# Altium PCB Window_shad_IIs.PcbDoc
Units mil, origin at the board's own origin, x right, y up, seen from the top; angles counter-clockwise.
Board outline 3937.01 x 1968.5 mil, 2 copper layers (Top Layer, Bottom Layer); 29 components, 40 nets, 153 pads, 16 vias.
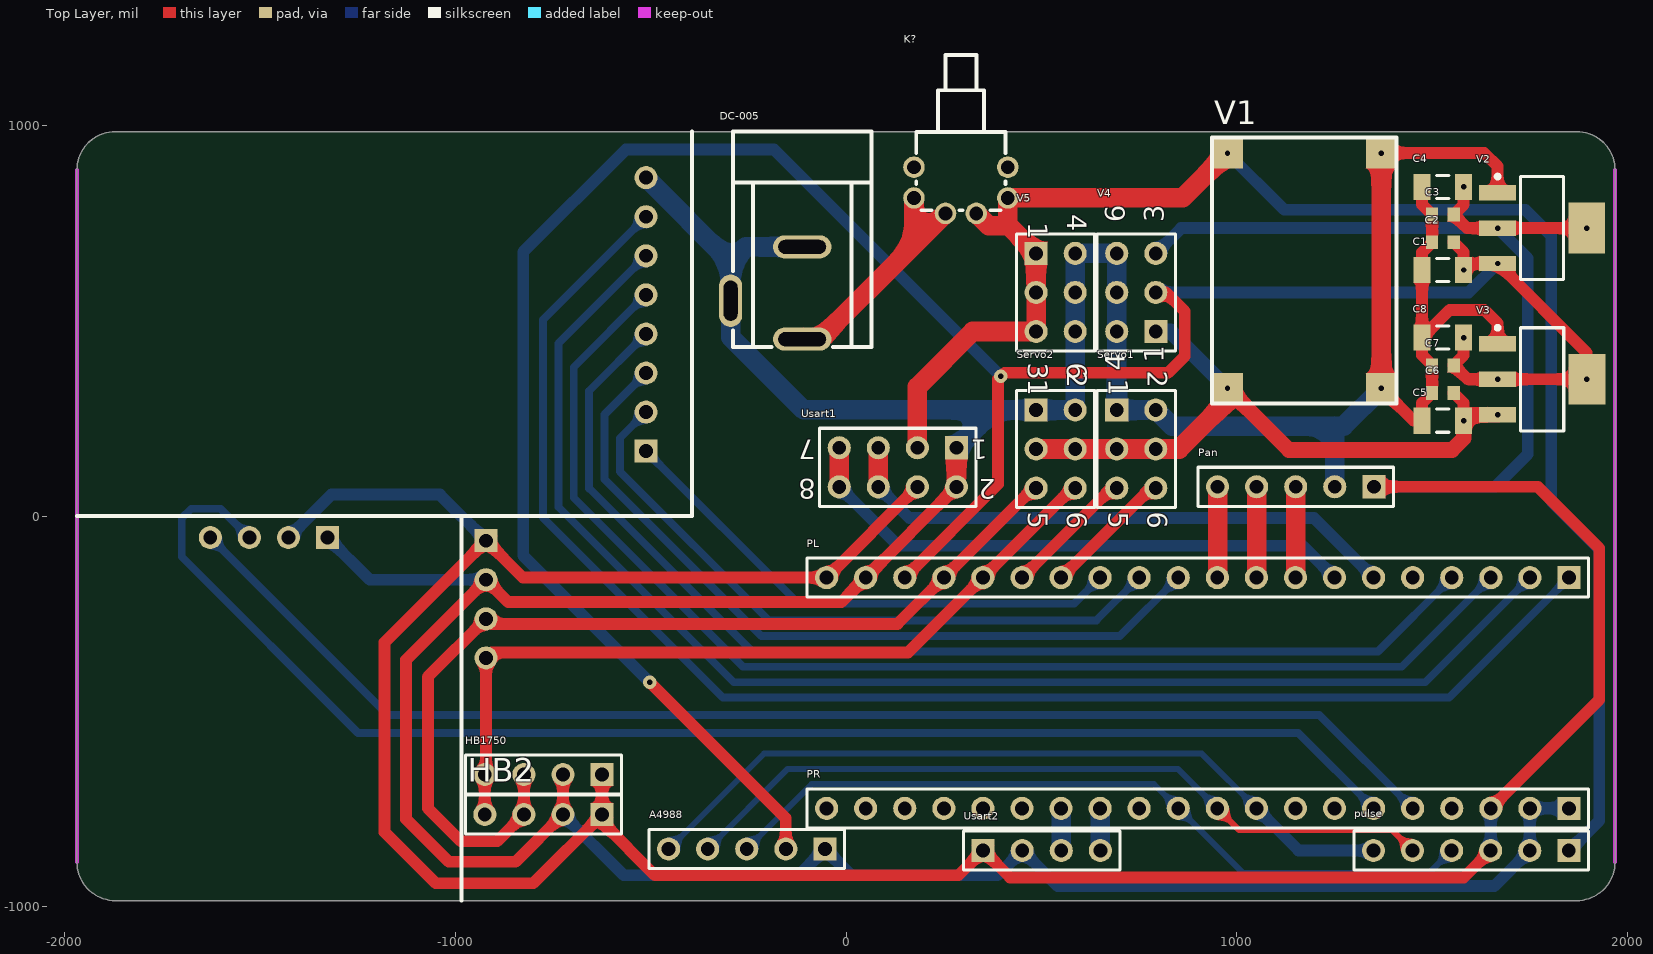
[diagram p0: Top Layer view]
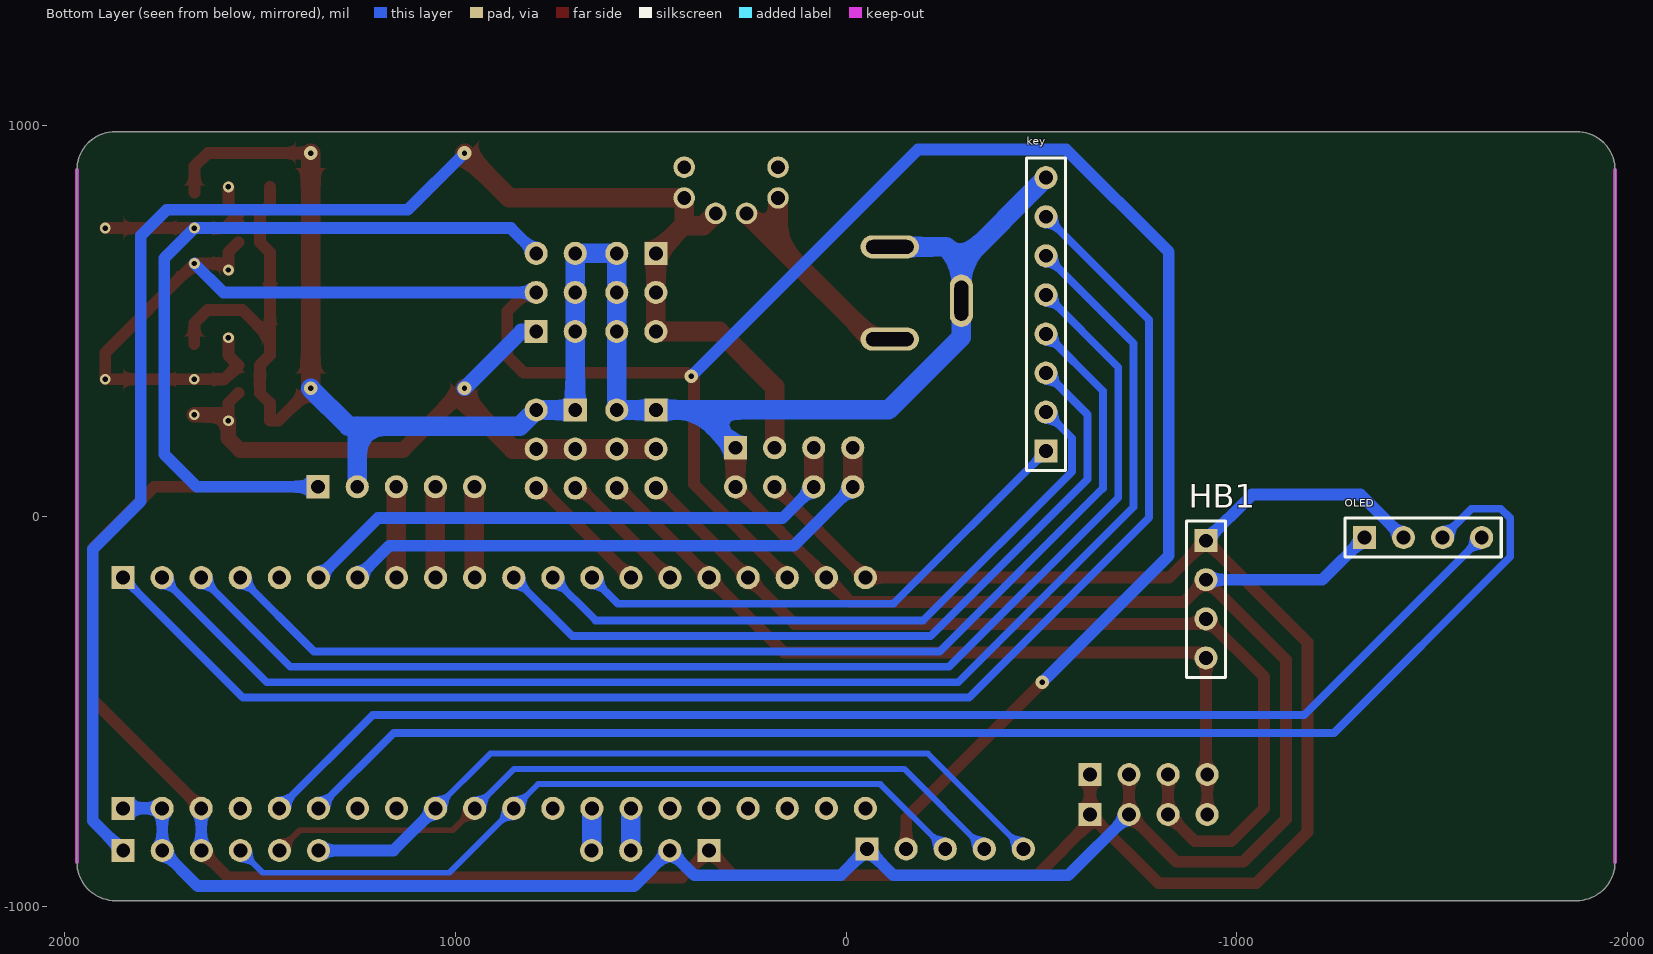
[diagram p1: Bottom Layer view, seen from below]

## Layer stack, top to bottom
Top Solder: solder mask 0.4, Solder Resist, Dk 3.5
Top Layer: signal copper 1.4
Dielectric 1: dielectric 12.6, FR-4, Dk 4.8
Bottom Layer: signal copper 1.4
Bottom Solder: solder mask 0.4, Solder Resist, Dk 3.5

## Board outline
-1870.08,-984.25 cw(c-1870.08,-885.83) -1968.5,-885.83 -1968.5,885.83 cw(c-1870.08,885.83) -1870.08,984.25 1870.08,984.25 cw(c1870.08,885.83) 1968.5,885.83 1968.5,-885.83 cw(c1870.08,-885.83) 1870.08,-984.25

## Design rules (kind name [scope] priority, off if disabled: settings)
Clearance [All] p1: gap=10 ignorepadtopadclearanceinfootprint=TRUE except(0: Arc-Hole Track-Hole SMDPad-Hole THPad-Hole Via-Hole Fill-Hole Poly-Hole Region-Hole Text-Hole)
ComponentClearance [All] p1: gap=0 collisioncheckmode=3 verticalgap=0 showdistances=FALSE
HoleToHoleClearance [All] p1: gap=0 allowstackedmicrovias=TRUE
MinimumSolderMaskSliver [All] p1: minsoldermaskwidth=0
PolygonConnect [All] p1: connectstyle=Direct reliefconductorwidth=10 reliefentries=4 polygonreliefangle="90 Angle" airgapwidth=10
RoutingVias [All] p1: holewidth=28 width=50 viastyle="Through Hole" minholewidth=10 minwidth=20 maxholewidth=58 maxwidth=100
SilkToSilkClearance [All] p1: silktosilkclearance=0
SilkToSolderMaskClearance [IsPad] p1: minsilkscreentomaskgap=0 clearancetoexposedcopper=TRUE
SolderMaskExpansion [All] p1: expansion=4
Width [All] p1: maxlimit=300 minlimit=10 preferedwidth=15
25 further rules are at their usual default settings.

## Components (designator, comment, footprint, x,y, rotation, side; value= is the part's Value field where it differs from the comment)
A4988 "Header 5" HDR1X5 -54,-852 r180 top
C1 "Cap Pol3" C1206 1527.56,629.92 r180 top value=10uf
C2 "Cap Semi" 1608[0603] 1527.56,700.79 r0 top value=104
C3 "Cap Semi" 1608[0603] 1527.56,771.65 r0 top value=104
C4 "Cap Pol3" C1206 1527.56,842.52 r180 top value=10uf
C5 "Cap Pol3" C1206 1527.56,244.09 r180 top value=10uf
C6 "Cap Semi" 1608[0603] 1527.56,314.96 r0 top value=104
C7 "Cap Semi" 1608[0603] 1527.56,385.83 r0 top value=104
C8 "Cap Pol3" C1206 1527.56,456.69 r180 top value=10uf
DC-005 "DC-005" DC12V -295.28,551.18 r270 top
HB1 "Header 4" HDR1X4 -921.26,-62.99 r270 bottom
HB2 "Header 4" HDR1X4 -624.41,-763.78 r180 top
HB1750 "Header 4" HDR1X4 -624.41,-661.42 r180 top
K? "BUTTON" Latching_switch 333.5,774.8 r180 top
key "Header 8" HDR1X8 -511.81,166.14 r90 bottom
OLED "Header 4" HDR1X4 -1327,-55 r180 bottom
Pan "Header 5" HDR1X5 1351,75 r180 top
PL "Header 20" HDR1X20 1850.39,-157.48 r180 top
PR "Header 20" HDR1X20 1850.39,-748.03 r180 top
pulse "Header 6" HDR1X6 1850,-856 r180 top
Servo1 "Header 3X2" HDR2X3 692.91,271.65 r270 top
Servo2 "Header 3X2" HDR2X3 486.61,271.65 r270 top
Usart1 "Header 4X2" HDR2X4 282.68,174.8 r180 top
Usart2 "Header 4" HDR1X4 351,-856 r0 top
V1 "LM2596S" MP1584EN 937.01,968.5 r270 top
V2 "AMS1117-3.3" SOT-223(AMS1117-3.3) 1781.81,737.07 r270 top
V3 "AMS1117-5" SOT-223(AMS1117-3.3) 1782,350.06 r270 top
V4 "Header 3X2A" HDR2X3_CEN 792.91,472.44 r90 top
V5 "Header 3X2A" HDR2X3_CEN 486.61,672.44 r270 top

## Footprints (in the part's own frame and the unit in brackets; to place one, negate y for a bottom-side part, rotate by r counter-clockwise, add the part's x,y. Pads: shape width x height; smd on the part's side, far side on the other; paste and mask are expansions set on the pad)
1608[0603] [mm] "Chip Capacitor, Body 1.6x0.8mm, IPC High Density"
  rect 0.8x0.9 smd: 1(-0.7,0) 2(0.7,0)
  body extent -0.87,-0.48 0.87,0.48, height 1.3
C1206 [mm] "Chip Capacitor, Body 3.2x1.6mm, IPC High Density"
  rect 1.1x1.7 smd: 1(-1.35,0) 2(1.35,0)
  silkscreen extent -0.4,-0.75 0.4,0.75, body extent -1.7,-0.9 1.7,0.9, height 1.3
DC12V [mil]
  oval 59.1x149.6 hole 35.4 slot 122.1 at 90 deg mask+2: 1(98.4,183.1) 2(-137.8,183.1)
  oval 133.9x59.1 hole 35.4 slot 102.4 at 0 deg mask+2: 3(0,0)
  silkscreen extent -433,6 118,360
HDR1X4 [mm] "Connector; Header; 4 Position"
  rect 1.5x1.5 hole 0.9: 1(0,0)
  round 1.5 hole 0.9: 2(2.54,0) 3(5.08,0) 4(7.62,0)
  silkscreen extent -1.27,-1.27 8.89,1.27
HDR1X5 [mm] "Connector; Header; 5 Position"
  rect 1.5x1.5 hole 0.9: 1(0,0)
  round 1.5 hole 0.9: 2(2.54,0) 3(5.08,0) 4(7.62,0) 5(10.16,0)
  silkscreen extent -1.27,-1.27 11.43,1.27
HDR1X6 [mm] "Connector; Header; 6 Position"
  rect 1.5x1.5 hole 0.9: 1(0,0)
  round 1.5 hole 0.9: 2(2.54,0) 3(5.08,0) 4(7.62,0) 5(10.16,0) 6(12.7,0)
  silkscreen extent -1.27,-1.27 13.97,1.27
HDR1X8 [mm] "Connector; Header; 8 Position"
  rect 1.5x1.5 hole 0.9: 1(0,0)
  round 1.5 hole 0.9: 2(2.54,0) 3(5.08,0) 4(7.62,0) 5(10.16,0) 6(12.7,0) 7(15.24,0) 8(17.78,0)
  silkscreen extent -1.27,-1.27 19.05,1.27
HDR1X20 [mm] "Connector; Header; 20 Position"
  rect 1.5x1.5 hole 0.9: 1(0,0)
  round 1.5 hole 0.9: 2(2.54,0) 3(5.08,0) 4(7.62,0) 5(10.16,0) 6(12.7,0) 7(15.24,0) 8(17.78,0) 9(20.32,0) 10(22.86,0) 11(25.4,0) 12(27.94,0) 13(30.48,0) 14(33.02,0) 15(35.56,0) 16(38.1,0) 17(40.64,0) 18(43.18,0) 19(45.72,0) 20(48.26,0)
  silkscreen extent -1.27,-1.27 49.53,1.27
HDR2X3 [mm] "Connector; Header; 3x2 Position"
  rect 1.5x1.5 hole 0.9: 1(0,0)
  round 1.5 hole 0.9: 2(0,2.54) 3(2.54,0) 4(2.54,2.54) 5(5.08,0) 6(5.08,2.54)
  silkscreen extent -1.27,-1.27 6.35,3.81
HDR2X3_CEN [mm] "Connector; Header; 3x2 Position"
  rect 1.5x1.5 hole 0.9: 1(0,0)
  round 1.5 hole 0.9: 2(2.54,0) 3(5.08,0) 4(0,2.54) 5(2.54,2.54) 6(5.08,2.54)
  silkscreen extent -1.27,-1.27 6.35,3.81
HDR2X4 [mm] "Connector; Header; 4x2 Position"
  rect 1.5x1.5 hole 0.9: 1(0,0)
  round 1.5 hole 0.9: 2(0,2.54) 3(2.54,0) 4(2.54,2.54) 5(5.08,0) 6(5.08,2.54) 7(7.62,0) 8(7.62,2.54)
  silkscreen extent -1.27,-1.27 8.89,3.81
Latching_switch [mil]
  round 55.1 hole 35.4 mask+2: 1(159.5,-118.2) 2(159.5,-39.4) 3(-80.7,-118.2) 4(-80.7,-39.4) 5(78.8,0) 6(0,0)
  silkscreen extent -75,-406 154,-8, body extent -89,-407 167,4, height 228
MP1584EN [mm]
  rect 2x2 smd: 1(1,11) 2(1,1) 3(16.3,11) 4(16.3,1)
  silkscreen extent 0,0 17.27,12
SOT-223(AMS1117-3.3) [mm]
  rect 1x2.4 smd: 1(-2.3,-2.9) 2(0,-2.9) 3(2.3,-2.9)
  rect 3.3x2.4 smd: 4(0,2.9)
  silkscreen extent -3.47,-3.02 3.35,1.4, body extent -3.25,-3.48 3.25,3.48, height 1.7

## Part data
A4988 Pan: "Header, 5-Pin", LatestRevisionDate=17-Jul-2002, LatestRevisionNote="Re-released for DXP Platform.", Publisher="Altium Limited"
C1 C4 C5 C8: "Polarized Capacitor (Surface Mount)", LatestRevisionDate=29-May-2009, LatestRevisionNote="IPC-7351 Footprint Added.", PackageDescription="Chip Capacitor", PackageReference=C0805, Published=8-Jun-2000, Publisher="Altium Limited"
C2 C3 C6 C7: "Capacitor (Semiconductor SIM Model)", LatestRevisionDate=29-May-2009, LatestRevisionNote="IPC-7351 Footprint Added.", PackageDescription="Chip Capacitor", PackageReference=C1206, Published=8-Jun-2000, Publisher="Altium Limited"
DC-005: library part "Header 3", "Header, 3-Pin", LatestRevisionDate=17-Jul-2002, LatestRevisionNote="Re-released for DXP Platform.", Publisher="Altium Limited"
HB1 HB2 HB1750 OLED Usart2: "Header, 4-Pin", LatestRevisionDate=17-Jul-2002, LatestRevisionNote="Re-released for DXP Platform.", Publisher="Altium Limited"
K?: library part KEY-6
key: "Header, 8-Pin", LatestRevisionDate=17-Jul-2002, LatestRevisionNote="Re-released for DXP Platform.", Publisher="Altium Limited"
PL PR: "Header, 20-Pin", LatestRevisionDate=17-Jul-2002, LatestRevisionNote="Re-released for DXP Platform.", Publisher="Altium Limited"
pulse: "Header, 6-Pin", LatestRevisionDate=17-Jul-2002, LatestRevisionNote="Re-released for DXP Platform.", Publisher="Altium Limited"
Servo1 Servo2 V4 V5: "Header, 3-Pin, Dual row", LatestRevisionDate=17-Jul-2002, LatestRevisionNote="Re-released for DXP Platform.", Publisher="Altium Limited"
Usart1: "Header, 4-Pin, Dual row", LatestRevisionDate=17-Jul-2002, LatestRevisionNote="Re-released for DXP Platform.", Publisher="Altium Limited"
V3: library part AMS1117-3.3

## Via types
v1: diameter 27.56, hole 13.78, Top Layer to Bottom Layer, tented both sides, 10 vias
v2: diameter 35, hole 13.78, Top Layer to Bottom Layer, tented both sides, 6 vias

## Nets (pads, with @x,y where several pads share a name; then routed paths per layer and width w, separated by ;. In a path a pad name is that pad's centre, name@x,y a point inside that pad or via, vN(x,y) a via of type N, cw(c..) or ccw(c..) an arc to the next point about the centre after c; other vN are vias at no path point)
GND: A4988.1 C1.2 C2.1 C3.1 C4.2 C5.2 C6.1 C7.1 C8.2 DC-005.2 DC-005.3 HB1.2 HB2.2 HB1750.2 key.8 OLED.1 Pan.2 PL.19 PR.1 PR.2 pulse.2 Servo1.1 Servo1.2 Servo2.1 Servo2.2 Usart1.1 Usart1.2 Usart2.2 V1.1 V1.3 V2.1 V3.1 V4.4 V4.5 V4.6 V5.4 V5.5 V5.6 | length 11742.5
  Top Layer w30: HB1750.2 HB2.2 -845.63,-885 -1017,-885 -1126,-776 -1126,-367.73 HB1.2 -864.25,-220 -12.13,-220 PL.19 Usart1.2 ; v2(1370.08,326.77) 1452.76,244.09 C5.2 1474.41,289.37 C6.1 C7.1 1474.41,411.42 C8.2 ; v2(1370.08,929.13) 1633.86,929.13 1667.64,895.36 V2.1 ; C4.2 1474.41,797.24 C3.1 C2.1 1474.41,675.2 C1.2 C8.2 ; V3.1 1667.83,493.59 1633.86,527.56 1545.28,527.56 C8.2
  Top Layer w50: Usart1.2 Usart1.1 ; v2(1370.08,326.77) v2(1370.08,929.13)
  Bottom Layer w30: OLED.1 -1219.01,-162.99 HB1.2 ; HB2.2 -569.19,-919 -121,-919 A4988.1 13,-919 388,-919 Usart2.2 542,-947 1659,-947 pulse.2 1750,-748.43 PR.2 PR.1
  Bottom Layer w50: key.8 -295.28,649.61 ; DC-005.2 -255.9,688.98 -295.28,649.61 ; Usart1.1 379.53,271.65 ; Pan.2 1251,230 ; v2(1370.08,326.77) 1273.31,230 1251,230 ; -295.28,649.61 DC-005.3 -295.28,458.28 -108.65,271.65 379.53,271.65 ; 379.53,271.65 Servo2.1 Servo2.2 V5.6 V5.5 V5.4 V4.6 V4.5 V4.4 Servo1.1 Servo1.2 834.57,230 1251,230
PA0: PR.16
PA1: PR.15
PA2: PR.14 Usart2.3 | length 108.2
  Bottom Layer w15: PR.14 PR.14@551,-748.64
  Bottom Layer w50: Usart2.3 PR.14@551,-748.64
PA3: PR.13 Usart2.4 | length 108.2
  Bottom Layer w15: PR.13 PR.13@651,-748.64
  Bottom Layer w50: Usart2.4 PR.13@651,-748.64
PA4: PR.12
PA5: A4988.3 PR.11 pulse.4 | length 1990.4
  Bottom Layer w15: A4988.3 -88,-686 788.36,-686 PR.11 1015.36,-913 1493,-913 pulse.4
PA6: A4988.4 PR.10 pulse.5 | length 1975.5
  Top Layer w15: PR.10 1006.36,-804 1398,-804 pulse.5
  Bottom Layer w15: A4988.4 -149,-647 849.36,-647 PR.10
PA7: A4988.5 PR.9 pulse.6 | length 2007.8
  Bottom Layer w15: A4988.5 -210,-608 910.36,-608 PR.9
  Bottom Layer w30: PR.9 1158.36,-856 pulse.6
PA8: PL.5
PA9: PL.6 Usart1.5 Usart1.6 | length 1463.9
  Top Layer w50: Usart1.6 Usart1.5
  Bottom Layer w30: Usart1.6 162.48,-5 1197.91,-5 PL.6
PA10: PL.7 Usart1.7 Usart1.8 | length 1463.9
  Top Layer w50: Usart1.8 Usart1.7
  Bottom Layer w30: Usart1.8 133.48,-76 1168.91,-76 PL.7
PA11: Pan.3 PL.8 | length 232.7
  Top Layer w50: PL.8 1151,-156.87 Pan.3
PA12: Pan.4 PL.9 | length 232.7
  Top Layer w50: PL.9 1051,-156.87 Pan.4
PA15: Pan.5 PL.10 | length 232.7
  Top Layer w50: PL.10 951,-156.87 Pan.5
PB0: PR.8
PB1: PR.7
PB3: key.3 PL.11 | length 2012.5
  Bottom Layer w20: key.3 -618.11,259.84 -618.11,94.49 -216.54,-307.09 700.79,-307.09 PL.11
PB4: key.2 PL.12 | length 1712.1
  Bottom Layer w20: key.2 -578.74,199.21 -578.74,114.17 -197.57,-267 640.87,-267 PL.12
PB5: key.1 PL.13 | length 1351.7
  Bottom Layer w20: key.1 -121.26,-224.41 583.46,-224.41 PL.13
PB6: PL.14 Servo1.6 | length 337.4
  Top Layer w30: PL.14 779.53,71.65 Servo1.6
PB7: PL.15 Servo1.5 | length 337.4
  Top Layer w30: PL.15 679.53,71.65 Servo1.5
PB8: HB1.4 HB2.4 HB1750.4 PL.16 Servo2.6 | length 2090
  Top Layer w30: HB2.4 HB1750.4 -921.26,-658.27 HB1.4 -907.27,-349 158.87,-349 PL.16 579.53,71.65 Servo2.6
PB9: HB1.3 HB2.3 HB1750.3 PL.17 Servo2.5 | length 2514.9
  Top Layer w30: HB1750.3 HB2.3 -892.63,-832 -986,-832 -1070,-748 -1070,-411.73 HB1.3 -908.25,-276 131.87,-276 PL.17 479.53,71.65 Servo2.5
PB10: OLED.3 PR.6 | length 3629.8
  Bottom Layer w20: OLED.3 -1601,19 -1676,19 -1700,-5 -1700,-104 -1249,-555 1157.36,-555 PR.6
PB11: OLED.4 PR.5 | length 3364.5
  Bottom Layer w20: OLED.4 -1173,-509 1211.36,-509 PR.5
PB12: key.7 PL.1 | length 3823.3
  Bottom Layer w20: key.7 -775.59,502.36 -775.59,-3.94 -314.96,-464.57 1543.31,-464.57 PL.1
PB13: key.6 PL.2 | length 3518.9
  Bottom Layer w20: key.6 -736.22,441.73 -736.22,23.62 -287.4,-425.2 1482.68,-425.2 PL.2
PB14: key.5 PL.3 | length 3216.8
  Bottom Layer w20: key.5 -696.85,381.1 -696.85,47.24 -263.78,-385.83 1422.05,-385.83 PL.3
PB15: key.4 PL.4 | length 2914.6
  Bottom Layer w20: key.4 -657.48,320.47 -657.48,70.87 -240.16,-346.46 1361.42,-346.46 PL.4
PC13: PR.19
PC14: PR.18
PC15: PR.17
RST: PR.4
VBT: PR.20
VCC_3.3V: C3.2 C4.1 HB1.1 HB2.1 HB1750.1 OLED.2 Pan.1 PL.20 PR.3 pulse.3 Usart1.4 Usart2.1 V2.2 V2.4 V4.3 | length 9821.4
  Top Layer w30: HB1750.1 HB2.1 ; Usart1.4 PL.20 -826.77,-157.48 HB1.1 -1181,-322.73 -1181,-809 -1050,-940 -800.63,-940 HB2.1 ; Pan.1 1771,75 1928,-82 1928,-470.43 PR.3 ; v1(1580.71,842.52) 1580.71,797.24 C3.2 1589.7,737.07 v1(1667.64,737.07) v1(1895.99,737.07) ; pulse.3 1581,-925 420,-925 Usart2.1 288,-919 -489,-919 -624.41,-783.59 HB2.1
  Bottom Layer w30: OLED.2 -1317,55 -1039.25,55 HB1.1 ; V4.3 857.54,737.07 v1(1667.64,737.07) 1745,659.71 1745,158.39 1661.61,75 Pan.1 ; pulse.3 1650,-748.43 PR.3
VCC_5V: A4988.2 C1.1 C2.2 C7.2 C8.1 PL.18 V2.3 V3.2 V3.4 V4.2 | length 6604.2
  Top Layer w30: v2(-502,-425) -154,-773 A4988.2 ; PL.18 389,81.13 389,350 406,367 825,367 867,409 867,524 818.56,572.44 V4.2 ; C2.2 1580.71,675.2 v1(1580.71,629.92) 1597.31,646.52 v1(1667.64,646.52) 1896.17,417.98 v1(1896.17,350.06) v1(1667.83,350.06) 1590.89,350.06 C7.2 1580.71,411.42 v1(1580.71,456.69)
  Bottom Layer w30: v2(-502,-425) -826,-101 -826,676 -564,938 -184,938 v2(396,358) ; V4.2 1593.56,572.44 v1(1667.64,646.52)
VCC_7.4V: C5.1 C6.2 Servo1.3 Servo1.4 Servo2.3 Servo2.4 V1.4 V3.3 V4.1 | length 1718.3
  Top Layer w30: C6.2 1580.71,289.37 v1(1580.71,244.09) C5.1@1596.12,259.5
  Top Layer w40: v2(976.38,326.77) 1133.86,169.29 1551.18,169.29 1580.71,198.82 v1(1580.71,244.09) ; C5.1@1596.12,259.5 v1(1667.83,259.5)
  Top Layer w50: Servo2.3 Servo2.4 Servo1.3 Servo1.4 852.76,171.65 976.38,295.28 v2(976.38,326.77)
  Bottom Layer w40: V4.1 830.71,472.44 v2(976.38,326.77)
VCC_12V: K?.4 K?.6 pulse.1 Usart1.3 V1.2 V5.1 V5.2 V5.3 | length 4169.5
  Top Layer w50: Usart1.3 182.68,330.68 324.44,472.44 V5.3 V5.2 V5.1 415.91,743.15 ; K?.6 365.15,743.15 415.91,743.15 ; v2(976.38,929.13) 861.44,814.2 K?.4 414.2,744.86 415.91,743.15
  Bottom Layer w30: v2(976.38,929.13) 1121.51,784 1739,784 1805,718 1805,38 1928,-85 1928,-780 pulse.1@1851,-857
VCC_DC: DC-005.1 K?.2 K?.5 | length 620.5
  Top Layer w50: DC-005.1 -67.22,452.78 174,694 ; K?.2 174,694 ; K?.5 174,694
pads on no net: K?.1 K?.3

## Keep-outs
Keep-Out Layer:
  lines w10: -1968.5,-885.83 -1968.5,885.83 ; 1968.5,-885.83 1968.5,885.83

## Silkscreen, mask and mechanical layers (free items; w line width, h text height)
Top Overlay:
  lines w10: -1968.5,0 -393.7,0 -393.7,984.25 ; -984.25,-984.25 -984.25,0
Bottom Solder:
  lines w10: -1968.5,-885.83 ccw(c-1870.08,-885.83) -1870.08,-984.25 1870.08,-984.25 ccw(c1870.08,-885.83) 1968.5,-885.83 ; -1968.5,885.83 cw(c-1870.08,885.83) -1870.08,984.25 1870.08,984.25 cw(c1870.08,885.83) 1968.5,885.83

## Text inside footprints (layer, text, board x,y; h text height)
Servo1: Top Overlay "6" at 772.91,11.65 h50 r270; Top Overlay "5" at 672.91,11.65 h50 r270; Top Overlay "2" at 772.91,371.65 h50 r270; Top Overlay "1" at 672.91,351.65 h50 r270
Servo2: Top Overlay "6" at 566.61,11.65 h50 r270; Top Overlay "5" at 466.61,11.65 h50 r270; Top Overlay "2" at 566.61,371.65 h50 r270; Top Overlay "1" at 466.61,351.65 h50 r270
Usart1: Top Overlay "2" at 382.68,94.8 h50 r180; Top Overlay "1" at 362.68,194.8 h50 r180; Top Overlay "7" at -77.32,194.8 h50 r180; Top Overlay "8" at -77.32,94.8 h50 r180
V4: Top Overlay "4" at 712.91,372.44 h50 r90; Top Overlay "1" at 812.91,392.44 h50 r90; Top Overlay "3" at 812.91,752.44 h50 r90; Top Overlay "6" at 712.91,752.44 h50 r90
V5: Top Overlay "4" at 566.61,772.44 h50 r270; Top Overlay "1" at 466.61,752.44 h50 r270; Top Overlay "3" at 466.61,392.44 h50 r270; Top Overlay "6" at 566.61,392.44 h50 r270